# Altium PCB 2015-01-31_17-58-54.PcbDoc
Units mil, origin at the board's own origin, x right, y up, seen from the top; angles counter-clockwise.
Board outline 2150 x 2550 mil, 4 copper layers (Top Layer, MidLayer1, MidLayer2, Bottom Layer); 10 components, 5 nets, 34 pads, 18 vias.
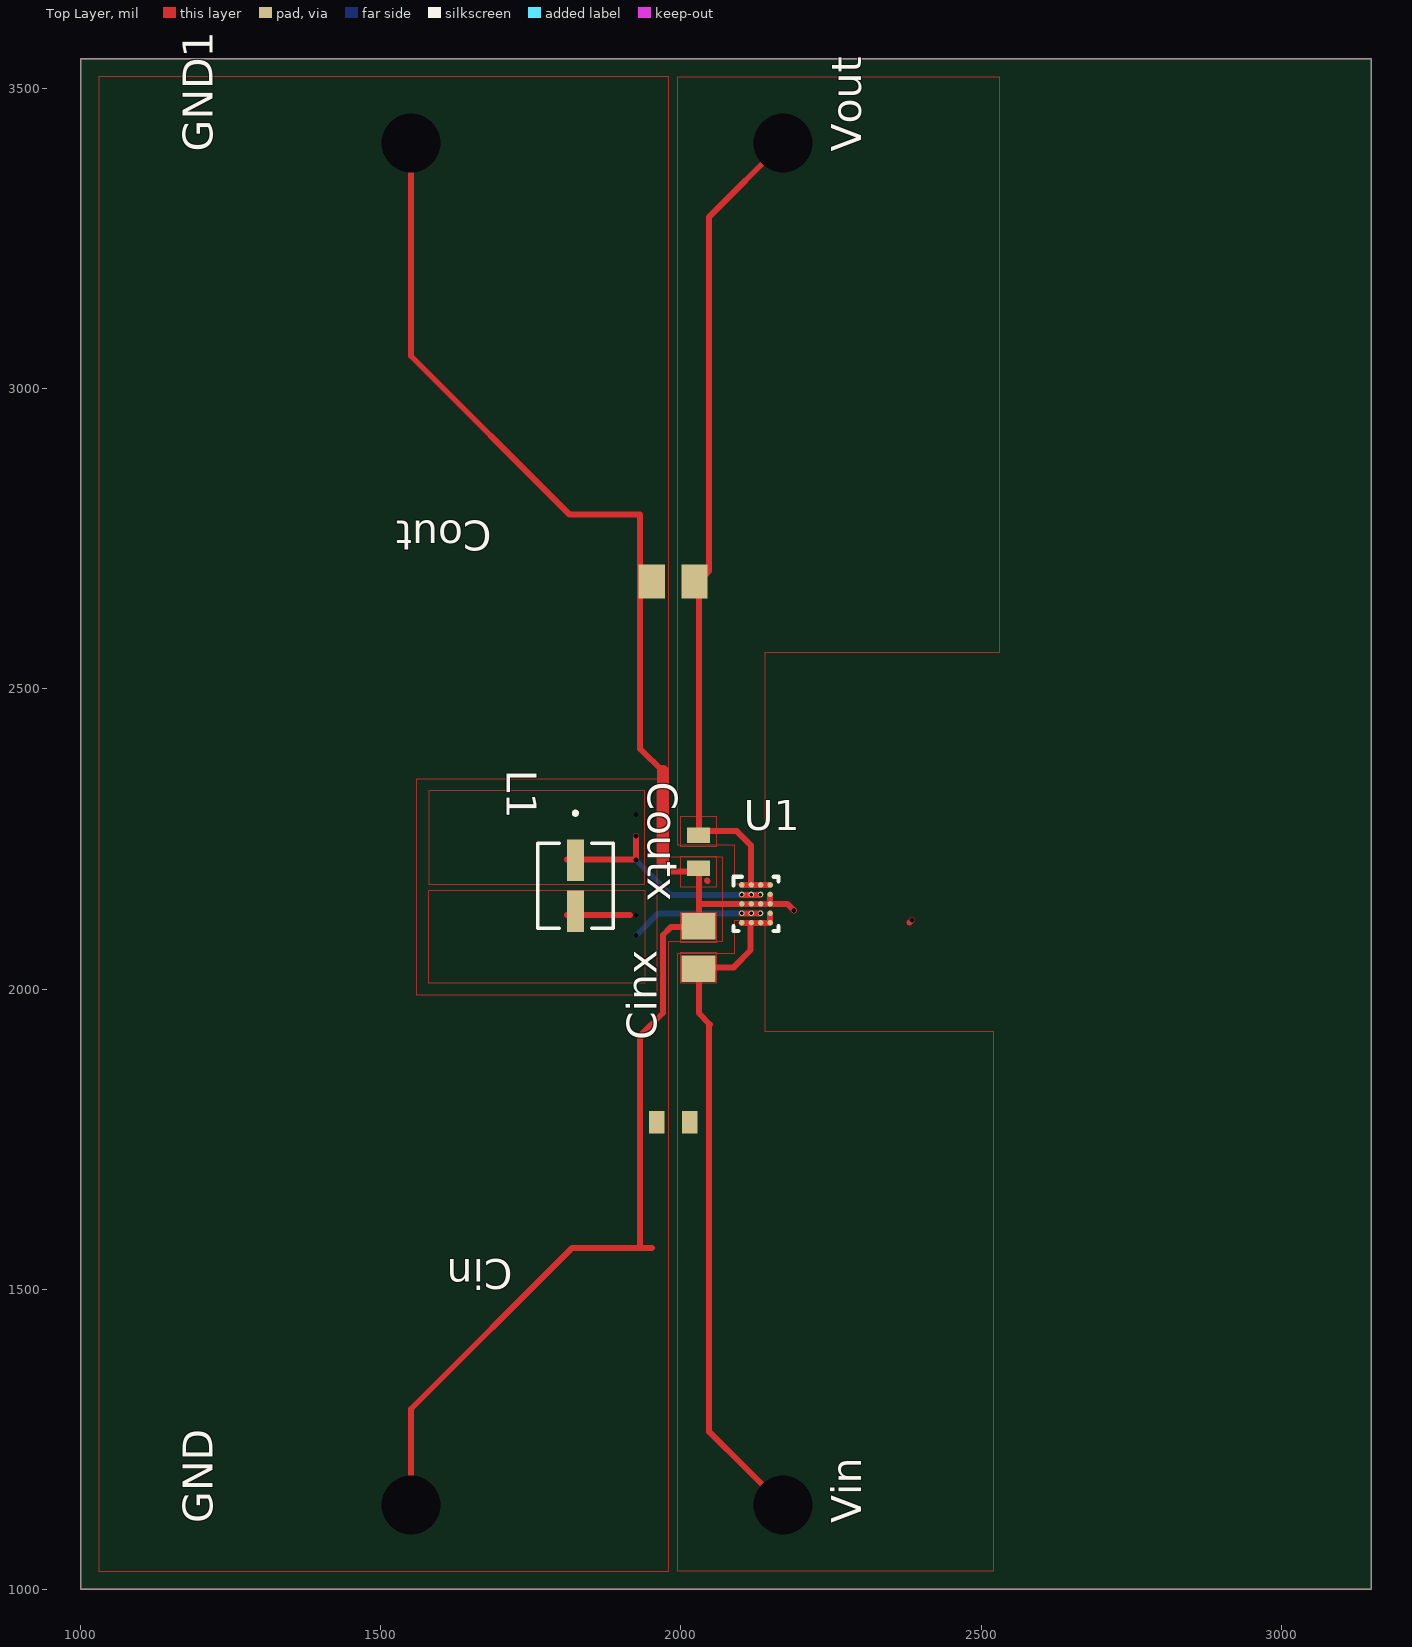
[diagram p0: Top Layer view]
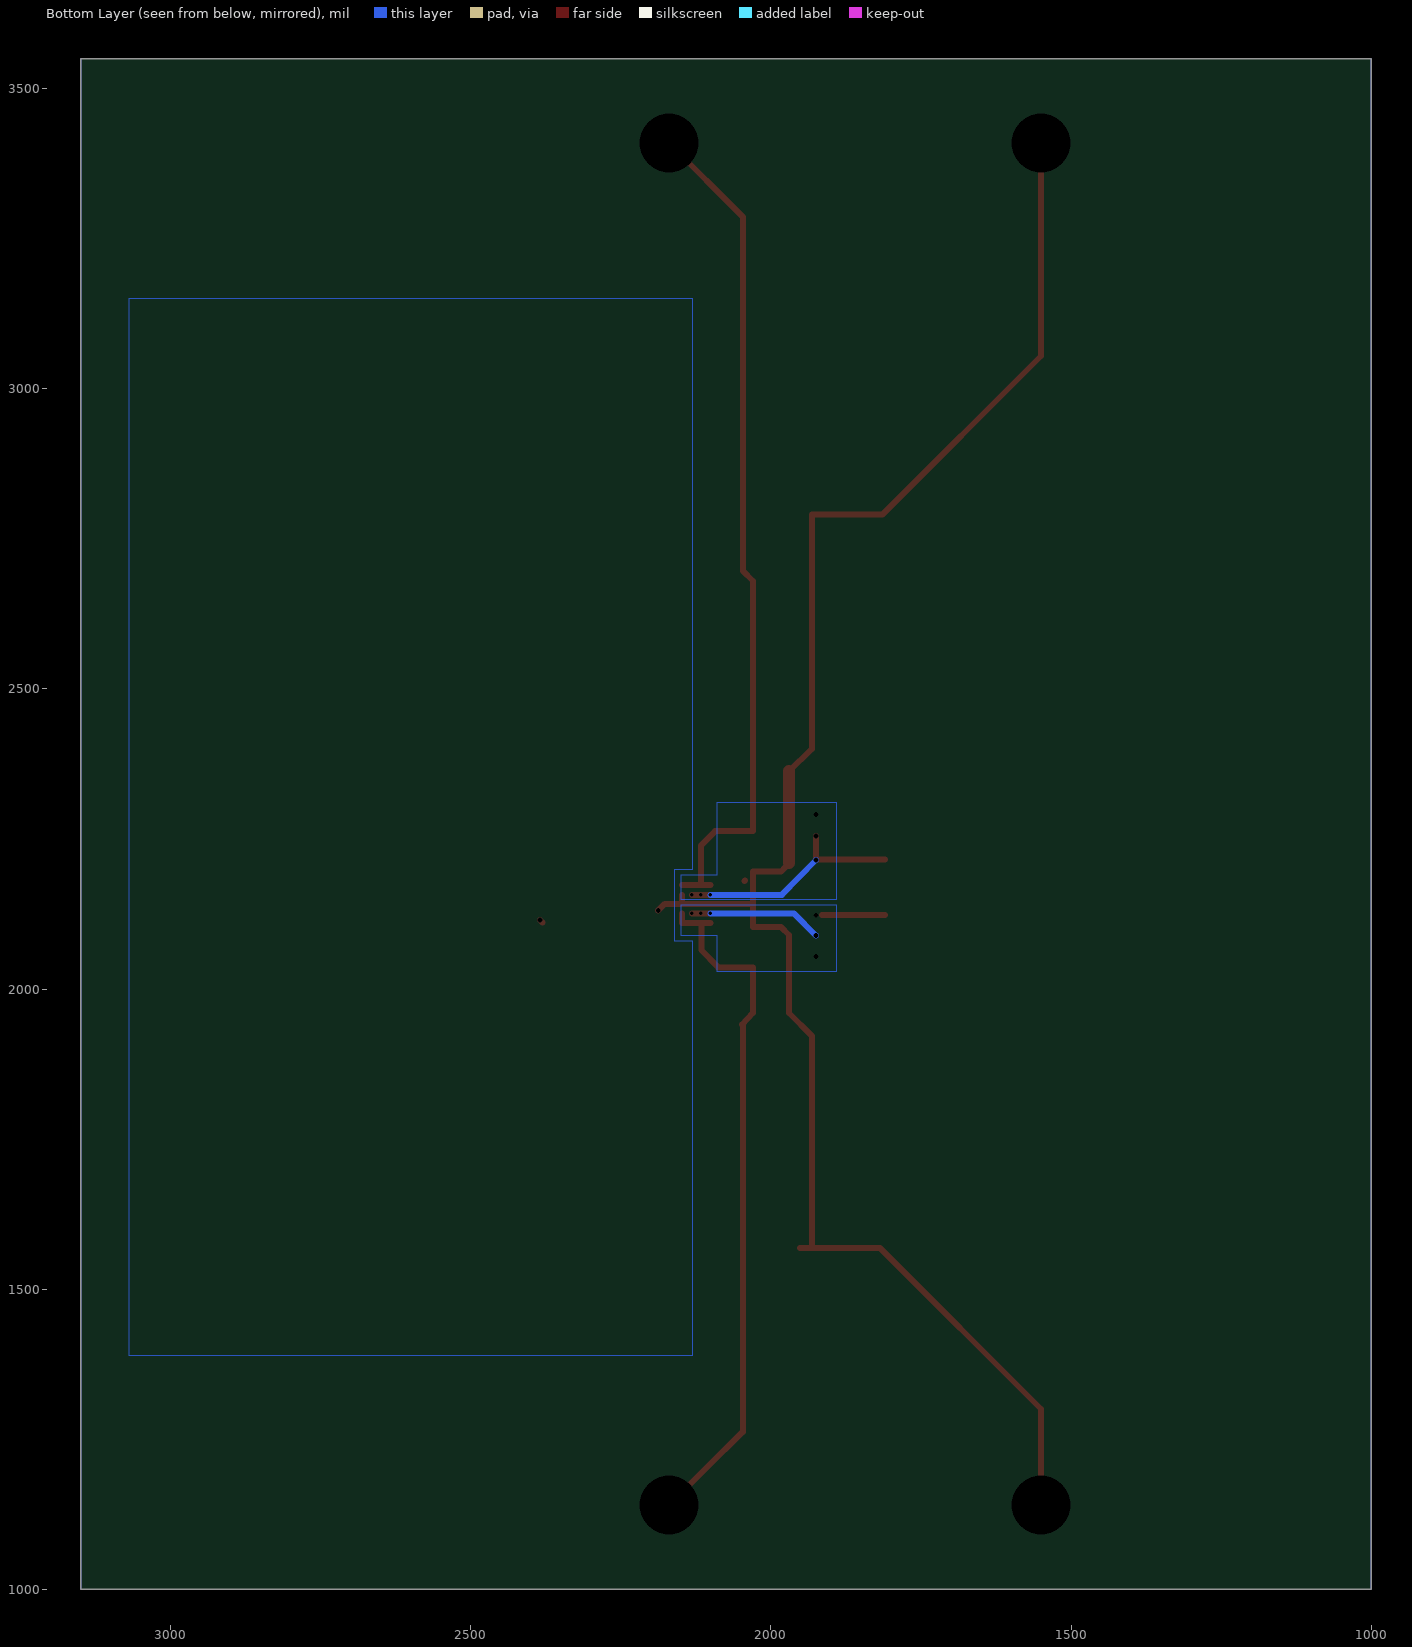
[diagram p1: Bottom Layer view, seen from below]

## Layer stack, top to bottom
Top Layer: signal copper 1.4
Dielectric: core 12.6, FR-4, Dk 4.8
MidLayer1: signal copper 1.4
Dielectric: prepreg 12.6, FR-4, Dk 4.8
MidLayer2: signal copper 1.4
Dielectric: core 12.6, FR-4, Dk 4.8
Bottom Layer: signal copper 1.4

## Board outline
1000,1000 3150,1000 3150,3550 1000,3550

## Design rules (kind name [scope] priority, off if disabled: settings)
PlaneConnect [All] p0: scope1count=1 scope1_0_kind=Board scope1_0_value=Board scope2count=1 scope2_0_kind=Board scope2_0_value=Board commentlength=0 planeconnectstyle=Direct reliefexpansion=20 reliefentries=4 reliefconductorwidth=10 reliefairgap=10
PlaneConnect [All] p1: planeconnectstyle=Direct reliefexpansion=20 reliefentries=4 reliefconductorwidth=10 reliefairgap=10
PolygonConnect [All] p0: scope1count=1 scope1_0_kind=Board scope1_0_value=Board scope2count=1 scope2_0_kind=Board scope2_0_value=Board commentlength=0 connectstyle=Direct reliefconductorwidth=10 reliefentries=4 polygonreliefangle="90 Angle"
PolygonConnect [All] p1: connectstyle=Direct reliefconductorwidth=10 reliefentries=4 polygonreliefangle="90 Angle"

## Components (designator, comment, footprint, x,y, rotation, side; value= is the part's Value field where it differs from the comment)
Cin "" 0603 1987,1778 r180 top
Cinx "" 0805 2029,2069 r90 top
Cout "" 0805 1987,2679 r180 top
Coutx "" 0603 2029,2229 r270 top
GND "" TP-1502 1548,1139 r90 top
GND1 "" TP-1502 1548,3409 r90 top
L1 "" IHLP-1212BZ 1824,2172 r270 top
U1 "" YFF0020AEBA 2125,2142 r0 top
Vin "" TP-1502 2168,1139 r90 top
Vout "" TP-1502 2168,3409 r90 top

## Footprints (in the part's own frame and the unit in brackets; to place one, negate y for a bottom-side part, rotate by r counter-clockwise, add the part's x,y. Pads: shape width x height; smd on the part's side, far side on the other; paste and mask are expansions set on the pad)
0603 [mil]
  rect 26x38 smd: 1(-27.5,0) 2(27.5,0)
0805 [mil]
  rect 44x57 smd: 1(-35.5,0) 2(35.5,0)
IHLP-1212BZ [mil]
  rect 69x28 smd: 1(-42.5,0) 2(42.5,0)
  silkscreen extent -124,-63 71,63
TP-1502 [mil]
  round 0 hole 32: 1(0,0)
YFF0020AEBA [mm]
  round 0.23 smd: 1(-0.6,0.8) 2(-0.2,0.8) 3(0.2,0.8) 4(0.6,0.8) 5(-0.6,0.4) 6(-0.2,0.4) 7(0.2,0.4) 8(0.6,0.4) 9(-0.6,0) 10(-0.2,0) 11(0.2,0) 12(0.6,0) 13(-0.6,-0.4) 14(-0.2,-0.4) 15(0.2,-0.4) 16(0.6,-0.4) 17(-0.6,-0.8) 18(-0.2,-0.8) 19(0.2,-0.8) 20(0.6,-0.8)
  silkscreen extent -0.95,-1.15 0.95,1.15

## Via types
v1: diameter 0, hole 8, Top Layer to Bottom Layer, 8 vias
v2: diameter 0, hole 6, Top Layer to Bottom Layer, 6 vias
v3: diameter 0, hole 98, Top Layer to Bottom Layer, 4 vias

## Nets (pads, with @x,y where several pads share a name; then routed paths per layer and width w, separated by ;. In a path a pad name is that pad's centre, name@x,y a point inside that pad or via, vN(x,y) a via of type N, cw(c..) or ccw(c..) an arc to the next point about the centre after c; other vN are vias at no path point)
0: Cin.2 Cinx.2 Cout.2 Coutx.2 GND1.1 GND.1 U1.8 U1.9 U1.10 U1.11 U1.12 | length 3062.1
  Top Layer w10: v3(1550,1140) 1550,1300 1818,1568 1952,1568 ; v3(1550,3410) 1550,3055 1814,2791 1932,2791 1932,2400 1970,2363 ; 1932,1570 1932,1922 1970,1960 1970,2090 1983,2103 2030,2103 2030,2140 ; 1970,2210 1983,2196 2030,2196 2030,2140 ; 2043,2181 2044,2180 ; U1.8@2148,2157 U1.12@2148,2142 ; v1(2188,2131) 2177,2142 U1.12@2148,2142 ; 2381,2111 v1(2385,2115) ; 2030,2140 2032,2142 2101,2142 2117,2142 2132,2142 U1.12@2148,2142
  Top Layer w20: 1970,2210 1970,2363
5: Cout.1 Coutx.1 U1.1 U1.2 U1.3 U1.4 Vout.1 | length 1413.9
  Top Layer w10: U1.1@2101,2173 U1.2@2117,2173 ; 2117,2238 U1.2@2117,2173 ; 2117,2239 2093,2263 2030,2263 2030,2680 2047,2697 2047,2791 2047,3287 v3(2170,3410) ; U1.4@2148,2173 2132,2173 U1.2@2117,2173
8: L1.1 U1.5 U1.6 U1.7 | length 384.1
  Top Layer w10: L1.1@1810,2216 1923,2216 1925,2218 v1(1925,2255) ; v2(2101,2157) v2(2117,2157) v2(2132,2157)
  Bottom Layer w10: v1(1925,2215) 1982,2157 v2(2101,2157)
  other v1: 1925,2291
9: L1.2 U1.13 U1.14 U1.15 | length 327.3
  Top Layer w10: L1.2@1810,2123 1915,2123 ; v2(2101,2126) v2(2117,2126) v2(2132,2126)
  Bottom Layer w10: v1(1925,2089) 1962,2126 v2(2101,2126)
  other v1: 1925,2054 1925,2123
10: Cin.1 Cinx.1 U1.16 U1.17 U1.18 U1.19 U1.20 Vin.1 | length 1159.6
  Top Layer w10: U1.17@2101,2110 2117,2110 2132,2110 2148,2110 U1.16@2148,2126 ; U1.18@2117,2108 2116,2107 2116,2065 2088,2036 2030,2036 2030,1960 2048,1941 2047,1940 2047,1570 2047,1262 v3(2170,1140)

## Polygon pours and split planes (outlines as drawn)
5 on Top Layer " " (solid, pour order 0): 2000,2237 2000,2288 2059,2288 2059,2237
10 on Top Layer " " (solid, pour order 1): 2000,2010 2000,2061 2059,2061 2059,2010
5 on Top Layer " " (solid, pour order 2): 2090,2175 2090,2240 1995,2240 1995,3520 2530,3520 2530,2560 2140,2560 2140,2175
8 on Top Layer " " (solid, pour order 3): 1940,2175 1940,2330 1580,2330 1580,2175
9 on Top Layer " " (solid, pour order 4): 1940,2165 1940,2010 1580,2010 1580,2165
10 on Top Layer " " (solid, pour order 5): 1995,2060 2090,2060 2090,2115 2140,2115 2140,1930 2520,1930 2520,1030 1995,1030
0 on Top Layer " " (solid, pour order 8): 2000,2170 2000,2221 2059,2221 2059,2170
0 on Top Layer " " (solid, pour order 9): 2000,2077 2000,2128 2059,2128 2059,2077
0 on Top Layer " " (solid, pour order 10): 1030,1030 1980,1030 1980,2080 2070,2080 2070,2220 1980,2220 1980,2340 1960,2340 1960,1990 1560,1990 1560,2350 1980,2350 1980,3520 1030,3520
9 on Bottom Layer " " (solid, pour order 6): 1890,2140 2150,2140 2150,2090 2090,2090 2090,2030 1890,2030
8 on Bottom Layer " " (solid, pour order 7): 1890,2150 1890,2310 2090,2310 2090,2190 2150,2190 2150,2150
0 on Bottom Layer " " (solid, pour order 11): 2130,1390 2130,2080 2160,2080 2160,2200 2130,2200 2130,3150 3070,3150 3070,1390
no net on Top Paste "Top Layer-No Net" (solid, remove dead copper): 2112.21,2176.45 2112.21,2170.54 2114.17,2170.54 2114.17,2176.45
no net on Top Paste "Top Layer-No Net" (solid, remove dead copper): 2120.08,2178.42 2114.17,2178.42 2114.17,2176.45 2120.08,2176.45
no net on Top Paste "Top Layer-No Net" (solid, remove dead copper): 2122.05,2170.54 2122.05,2176.45 2120.08,2176.45 2120.08,2170.54
no net on Top Paste "Top Layer-No Net" (solid, remove dead copper): 2114.17,2176.45 2114.17,2170.54 2120.08,2170.54 2120.08,2176.45
no net on Top Paste "Top Layer-No Net" (solid, remove dead copper): 2098.43,2176.45 2098.43,2170.54 2104.33,2170.54 2104.33,2176.45
no net on Top Paste "Top Layer-No Net" (solid, remove dead copper): 2106.3,2170.54 2106.3,2176.45 2104.33,2176.45 2104.33,2170.54
no net on Top Paste "Top Layer-No Net" (solid, remove dead copper): 2104.33,2178.42 2098.43,2178.42 2098.43,2176.45 2104.33,2176.45
no net on Top Paste "Top Layer-No Net" (solid, remove dead copper): 2096.46,2176.45 2096.46,2170.54 2098.43,2170.54 2098.43,2176.45
no net on Top Paste "Top Layer-No Net" (solid, remove dead copper): 2098.43,2168.57 2104.33,2168.57 2104.33,2170.54 2098.43,2170.54
no net on Top Paste "Top Layer-No Net" (solid, remove dead copper): 2145.67,2152.83 2151.58,2152.83 2151.58,2154.8 2145.67,2154.8
no net on Top Paste "Top Layer-No Net" (solid, remove dead copper): 2143.7,2160.7 2143.7,2154.8 2145.67,2154.8 2145.67,2160.7
no net on Top Paste "Top Layer-No Net" (solid, remove dead copper): 2151.58,2162.67 2145.67,2162.67 2145.67,2160.7 2151.58,2160.7
no net on Top Paste "Top Layer-No Net" (solid, remove dead copper): 2153.54,2154.8 2153.54,2160.7 2151.58,2160.7 2151.58,2154.8
no net on Top Paste "Top Layer-No Net" (solid, remove dead copper): 2145.67,2160.7 2145.67,2154.8 2151.58,2154.8 2151.58,2160.7
no net on Top Paste "Top Layer-No Net" (solid, remove dead copper): 2129.92,2152.83 2135.83,2152.83 2135.83,2154.8 2129.92,2154.8
no net on Top Paste "Top Layer-No Net" (solid, remove dead copper): 2127.95,2160.7 2127.95,2154.8 2129.92,2154.8 2129.92,2160.7
no net on Top Paste "Top Layer-No Net" (solid, remove dead copper): 2135.83,2162.67 2129.92,2162.67 2129.92,2160.7 2135.83,2160.7
no net on Top Paste "Top Layer-No Net" (solid, remove dead copper): 2137.8,2154.8 2137.8,2160.7 2135.83,2160.7 2135.83,2154.8
no net on Top Paste "Top Layer-No Net" (solid, remove dead copper): 2129.92,2160.7 2129.92,2154.8 2135.83,2154.8 2135.83,2160.7
no net on Top Paste "Top Layer-No Net" (solid, remove dead copper): 2114.17,2152.83 2120.08,2152.83 2120.08,2154.8 2114.17,2154.8
no net on Top Paste "Top Layer-No Net" (solid, remove dead copper): 2112.21,2160.7 2112.21,2154.8 2114.17,2154.8 2114.17,2160.7
no net on Top Paste "Top Layer-No Net" (solid, remove dead copper): 2120.08,2162.67 2114.17,2162.67 2114.17,2160.7 2120.08,2160.7
no net on Top Paste "Top Layer-No Net" (solid, remove dead copper): 2122.05,2154.8 2122.05,2160.7 2120.08,2160.7 2120.08,2154.8
no net on Top Paste "Top Layer-No Net" (solid, remove dead copper): 2114.17,2160.7 2114.17,2154.8 2120.08,2154.8 2120.08,2160.7
no net on Top Paste "Top Layer-No Net" (solid, remove dead copper): 2098.43,2160.7 2098.43,2154.8 2104.33,2154.8 2104.33,2160.7
no net on Top Paste "Top Layer-No Net" (solid, remove dead copper): 2106.3,2154.8 2106.3,2160.7 2104.33,2160.7 2104.33,2154.8
no net on Top Paste "Top Layer-No Net" (solid, remove dead copper): 2104.33,2162.67 2098.43,2162.67 2098.43,2160.7 2104.33,2160.7
no net on Top Paste "Top Layer-No Net" (solid, remove dead copper): 2096.46,2160.7 2096.46,2154.8 2098.43,2154.8 2098.43,2160.7
no net on Top Paste "Top Layer-No Net" (solid, remove dead copper): 2098.43,2152.83 2104.33,2152.83 2104.33,2154.8 2098.43,2154.8
no net on Top Paste "Top Layer-No Net" (solid, remove dead copper): 2145.67,2137.08 2151.58,2137.08 2151.58,2139.05 2145.67,2139.05
no net on Top Paste "Top Layer-No Net" (solid, remove dead copper): 2143.7,2144.95 2143.7,2139.05 2145.67,2139.05 2145.67,2144.95
no net on Top Paste "Top Layer-No Net" (solid, remove dead copper): 2151.58,2146.92 2145.67,2146.92 2145.67,2144.95 2151.58,2144.95
no net on Top Paste "Top Layer-No Net" (solid, remove dead copper): 2153.54,2139.05 2153.54,2144.95 2151.58,2144.95 2151.58,2139.05
no net on Top Paste "Top Layer-No Net" (solid, remove dead copper): 2145.67,2144.95 2145.67,2139.05 2151.58,2139.05 2151.58,2144.95
no net on Top Paste "Top Layer-No Net" (solid, remove dead copper): 2129.92,2137.08 2135.83,2137.08 2135.83,2139.05 2129.92,2139.05
no net on Top Paste "Top Layer-No Net" (solid, remove dead copper): 2127.95,2144.95 2127.95,2139.05 2129.92,2139.05 2129.92,2144.95
no net on Top Paste "Top Layer-No Net" (solid, remove dead copper): 2135.83,2146.92 2129.92,2146.92 2129.92,2144.95 2135.83,2144.95
no net on Top Paste "Top Layer-No Net" (solid, remove dead copper): 2137.8,2139.05 2137.8,2144.95 2135.83,2144.95 2135.83,2139.05
no net on Top Paste "Top Layer-No Net" (solid, remove dead copper): 2129.92,2144.95 2129.92,2139.05 2135.83,2139.05 2135.83,2144.95
no net on Top Paste "Top Layer-No Net" (solid, remove dead copper): 2114.17,2137.08 2120.08,2137.08 2120.08,2139.05 2114.17,2139.05
no net on Top Paste "Top Layer-No Net" (solid, remove dead copper): 2112.21,2144.95 2112.21,2139.05 2114.17,2139.05 2114.17,2144.95
no net on Top Paste "Top Layer-No Net" (solid, remove dead copper): 2120.08,2146.92 2114.17,2146.92 2114.17,2144.95 2120.08,2144.95
no net on Top Paste "Top Layer-No Net" (solid, remove dead copper): 2122.05,2139.05 2122.05,2144.95 2120.08,2144.95 2120.08,2139.05
no net on Top Paste "Top Layer-No Net" (solid, remove dead copper): 2114.17,2144.95 2114.17,2139.05 2120.08,2139.05 2120.08,2144.95
no net on Top Paste "Top Layer-No Net" (solid, remove dead copper): 2098.43,2144.95 2098.43,2139.05 2104.33,2139.05 2104.33,2144.95
no net on Top Paste "Top Layer-No Net" (solid, remove dead copper): 2106.3,2139.05 2106.3,2144.95 2104.33,2144.95 2104.33,2139.05
no net on Top Paste "Top Layer-No Net" (solid, remove dead copper): 2104.33,2146.92 2098.43,2146.92 2098.43,2144.95 2104.33,2144.95
no net on Top Paste "Top Layer-No Net" (solid, remove dead copper): 2096.46,2144.95 2096.46,2139.05 2098.43,2139.05 2098.43,2144.95
no net on Top Paste "Top Layer-No Net" (solid, remove dead copper): 2098.43,2137.08 2104.33,2137.08 2104.33,2139.05 2098.43,2139.05
no net on Top Paste "Top Layer-No Net" (solid, remove dead copper): 2145.67,2121.33 2151.58,2121.33 2151.58,2123.3 2145.67,2123.3
no net on Top Paste "Top Layer-No Net" (solid, remove dead copper): 2143.7,2129.2 2143.7,2123.3 2145.67,2123.3 2145.67,2129.2
no net on Top Paste "Top Layer-No Net" (solid, remove dead copper): 2151.58,2131.17 2145.67,2131.17 2145.67,2129.2 2151.58,2129.2
no net on Top Paste "Top Layer-No Net" (solid, remove dead copper): 2153.54,2123.3 2153.54,2129.2 2151.58,2129.2 2151.58,2123.3
no net on Top Paste "Top Layer-No Net" (solid, remove dead copper): 2145.67,2129.2 2145.67,2123.3 2151.58,2123.3 2151.58,2129.2
no net on Top Paste "Top Layer-No Net" (solid, remove dead copper): 2129.92,2121.33 2135.83,2121.33 2135.83,2123.3 2129.92,2123.3
no net on Top Paste "Top Layer-No Net" (solid, remove dead copper): 2127.95,2129.2 2127.95,2123.3 2129.92,2123.3 2129.92,2129.2
no net on Top Paste "Top Layer-No Net" (solid, remove dead copper): 2135.83,2131.17 2129.92,2131.17 2129.92,2129.2 2135.83,2129.2
no net on Top Paste "Top Layer-No Net" (solid, remove dead copper): 2137.8,2123.3 2137.8,2129.2 2135.83,2129.2 2135.83,2123.3
no net on Top Paste "Top Layer-No Net" (solid, remove dead copper): 2129.92,2129.2 2129.92,2123.3 2135.83,2123.3 2135.83,2129.2
no net on Top Paste "Top Layer-No Net" (solid, remove dead copper): 2114.17,2121.33 2120.08,2121.33 2120.08,2123.3 2114.17,2123.3
no net on Top Paste "Top Layer-No Net" (solid, remove dead copper): 2112.21,2129.2 2112.21,2123.3 2114.17,2123.3 2114.17,2129.2
no net on Top Paste "Top Layer-No Net" (solid, remove dead copper): 2120.08,2131.17 2114.17,2131.17 2114.17,2129.2 2120.08,2129.2
no net on Top Paste "Top Layer-No Net" (solid, remove dead copper): 2122.05,2123.3 2122.05,2129.2 2120.08,2129.2 2120.08,2123.3
no net on Top Paste "Top Layer-No Net" (solid, remove dead copper): 2114.17,2129.2 2114.17,2123.3 2120.08,2123.3 2120.08,2129.2
no net on Top Paste "Top Layer-No Net" (solid, remove dead copper): 2098.43,2129.2 2098.43,2123.3 2104.33,2123.3 2104.33,2129.2
no net on Top Paste "Top Layer-No Net" (solid, remove dead copper): 2106.3,2123.3 2106.3,2129.2 2104.33,2129.2 2104.33,2123.3
no net on Top Paste "Top Layer-No Net" (solid, remove dead copper): 2104.33,2131.17 2098.43,2131.17 2098.43,2129.2 2104.33,2129.2
no net on Top Paste "Top Layer-No Net" (solid, remove dead copper): 2096.46,2129.2 2096.46,2123.3 2098.43,2123.3 2098.43,2129.2
no net on Top Paste "Top Layer-No Net" (solid, remove dead copper): 2098.43,2121.33 2104.33,2121.33 2104.33,2123.3 2098.43,2123.3
no net on Top Paste "Top Layer-No Net" (solid, remove dead copper): 2145.67,2105.58 2151.58,2105.58 2151.58,2107.55 2145.67,2107.55
no net on Top Paste "Top Layer-No Net" (solid, remove dead copper): 2143.7,2113.46 2143.7,2107.55 2145.67,2107.55 2145.67,2113.46
no net on Top Paste "Top Layer-No Net" (solid, remove dead copper): 2151.58,2115.43 2145.67,2115.43 2145.67,2113.46 2151.58,2113.46
no net on Top Paste "Top Layer-No Net" (solid, remove dead copper): 2153.54,2107.55 2153.54,2113.46 2151.58,2113.46 2151.58,2107.55
no net on Top Paste "Top Layer-No Net" (solid, remove dead copper): 2145.67,2113.46 2145.67,2107.55 2151.58,2107.55 2151.58,2113.46
no net on Top Paste "Top Layer-No Net" (solid, remove dead copper): 2129.92,2105.58 2135.83,2105.58 2135.83,2107.55 2129.92,2107.55
no net on Top Paste "Top Layer-No Net" (solid, remove dead copper): 2127.95,2113.46 2127.95,2107.55 2129.92,2107.55 2129.92,2113.46
no net on Top Paste "Top Layer-No Net" (solid, remove dead copper): 2135.83,2115.43 2129.92,2115.43 2129.92,2113.46 2135.83,2113.46
no net on Top Paste "Top Layer-No Net" (solid, remove dead copper): 2137.8,2107.55 2137.8,2113.46 2135.83,2113.46 2135.83,2107.55
no net on Top Paste "Top Layer-No Net" (solid, remove dead copper): 2129.92,2113.46 2129.92,2107.55 2135.83,2107.55 2135.83,2113.46
no net on Top Paste "Top Layer-No Net" (solid, remove dead copper): 2114.17,2105.58 2120.08,2105.58 2120.08,2107.55 2114.17,2107.55
no net on Top Paste "Top Layer-No Net" (solid, remove dead copper): 2112.21,2113.46 2112.21,2107.55 2114.17,2107.55 2114.17,2113.46
no net on Top Paste "Top Layer-No Net" (solid, remove dead copper): 2120.08,2115.43 2114.17,2115.43 2114.17,2113.46 2120.08,2113.46
no net on Top Paste "Top Layer-No Net" (solid, remove dead copper): 2122.05,2107.55 2122.05,2113.46 2120.08,2113.46 2120.08,2107.55
no net on Top Paste "Top Layer-No Net" (solid, remove dead copper): 2114.17,2113.46 2114.17,2107.55 2120.08,2107.55 2120.08,2113.46
no net on Top Paste "Top Layer-No Net" (solid, remove dead copper): 2098.43,2113.46 2098.43,2107.55 2104.33,2107.55 2104.33,2113.46
no net on Top Paste "Top Layer-No Net" (solid, remove dead copper): 2106.3,2107.55 2106.3,2113.46 2104.33,2113.46 2104.33,2107.55
no net on Top Paste "Top Layer-No Net" (solid, remove dead copper): 2104.33,2115.43 2098.43,2115.43 2098.43,2113.46 2104.33,2113.46
no net on Top Paste "Top Layer-No Net" (solid, remove dead copper): 2096.46,2113.46 2096.46,2107.55 2098.43,2107.55 2098.43,2113.46
no net on Top Paste "Top Layer-No Net" (solid, remove dead copper): 2098.43,2105.58 2104.33,2105.58 2104.33,2107.55 2098.43,2107.55

## Other copper
Multi-Layer:
  the board outline again, w1